# EAGLE board main (EAGLE 9.2.2)

Size 73.64 x 34.34 mm. Coordinates in mm from the lower left corner, seen from the top.
Outline: 0,0 73.64,0 73.64,34.21 0.13,34.34 0,0
Copper layers (1*16): Top 0.035mm / dielectric 1.5mm / Bottom 0.035mm
Design rules "default": minimum track width 6mil, minimum drill 0.35mm, track to track 6mil, track to pad 6mil, pad to pad 6mil, via to via 6mil, smd to smd 6mil, copper to edge 40mil, drill to drill 6mil, minimum pad ring 10mil, minimum via ring 8mil, stop-mask expansion 4mil, vias tented up to drill 0mil, thermal gap 10mil
Holes 1.27 mm at 3.68,2.16 6.22,2.16 62.48,2.41 64.9,2.54 43.43,2.41 46.1,2.41

## Footprints (pad centres in the part's own frame; a part is rotated, then mirrored left to right if it is on the bottom)
1X02 = drill 1.016 square: 1 -1.27,0 | drill 1.016 octagon: 2 1.27,0
TO92-EBC = drill 0.813 long: B 0,-1.27; C -2.54,-1.27; E 2.54,-1.27
C0402 = smd 0.7 x 0.9: 1 -0.65,0; 2 0.65,0
1206 = smd 0.7 x 0.4: P$1 0,0.5; P$2 0,-0.5
LORA-RA2-SMD = smd 3.6 x 1.2: 1 -8,7; 2 -8,5; 3 -8,3; 4 -8,1; 5 -8,-1; 6 -8,-3; 7 -8,-5; 8 -8,-7; 9 8,-7; 10 8,-5; 11 8,-3; 12 8,-1; 13 8,1; 14 8,3; 15 8,5; 16 8,7
RASPBERRYPI_BASTELSTUBE_V13_RASPI_BOARD_B+_FULL = drill 1 pad 1.778 square: 1 8.37,25.23 | drill 1 pad 1.778: 2 8.37,27.77; 3 10.91,25.23; 4 10.91,27.77; 5 13.45,25.23; 6 13.45,27.77; 7 15.99,25.23; 8 15.99,27.77; 9 18.53,25.23; 10 18.53,27.77; 11 21.07,25.23; 12 21.07,27.77; 13 23.61,25.23; 14 23.61,27.77; 15 26.15,25.23; 16 26.15,27.77; 17 28.69,25.23; 18 28.69,27.77; 19 31.23,25.23; 20 31.23,27.77; 21 33.77,25.23; 22 33.77,27.77; 23 36.31,25.23; 24 36.31,27.77; 25 38.85,25.23; 26 38.85,27.77; 27 41.39,25.23; 28 41.39,27.77; 29 43.93,25.23; 30 43.93,27.77; 31 46.47,25.23; 32 46.47,27.77; 33 49.01,25.23; 34 49.01,27.77; 35 51.55,25.23; 36 51.55,27.77; 37 54.09,25.23; 38 54.09,27.77; 39 56.63,25.23; 40 56.63,27.77 | hole 2.75: 3.5,3.5; 3.5,26.5; 61.5,3.5; 61.5,26.5
S7V8F3 = drill 0.9 pad 1.676: GND -1.27,-6.35; SHDN 3.81,-6.35; VIN 1.27,-6.35; VOUT -3.81,-6.35
TYCO_1MM_8PIN = smd 0.61 x 2.54: P$1 -3.5,4.5; P$2 -2.5,4.5; P$3 -1.5,4.5; P$4 -0.5,4.5; P$5 0.5,4.5; P$6 1.5,4.5; P$7 2.5,4.5; P$8 3.5,4.5
TYCO_1MM_12PIN = smd 0.61 x 2.5: P$1 -5.5,6; P$2 -4.5,6; P$3 -3.5,6; P$4 -2.5,6; P$5 -1.5,6; P$6 -0.5,6; P$7 0.5,6; P$8 1.5,6; P$9 2.5,6; P$10 3.5,6; P$11 4.5,6; P$12 5.5,6
BREAKBOARD = drill 0.9 pad 1.676: + 1.27,8.89; - -1.27,8.89; ALT -3.81,1.27; GND -3.81,3.81; QST 3.81,1.27; SCL 3.81,3.81; SDA 3.81,6.35; VCC -3.81,6.35

## Placement (x,y rotation side)
BAT1  [1X02]  4.95,4.45 0 top
BAT2  [1X02]  63.75,4.7 0 top
BC639  BCX59SMD  [TO92-EBC]  36.83,7.62 0 top
C1  [C0402]  1.9,-2.54 0 top
C2  [C0402]  1.9,-6.35 0 top  (outside the outline)
C3  [C0402]  1.9,-10.16 0 top  (outside the outline)
C4  [C0402]  1.9,-13.97 0 top  (outside the outline)
C5  [C0402]  1.9,-17.78 0 top  (outside the outline)
C6  [C0402]  1.9,-21.59 0 top  (outside the outline)
C7  [C0402]  1.9,-25.4 0 top  (outside the outline)
D1  DIODE1206  [1206]  6.22,9.02 180 bottom
FUSE1  [1X02]  11.3,4.45 0 top
FUSE2  [1X02]  55.5,4.57 0 top
LED_OUTPUT  [1X02]  44.7,7.49 180 top
R1  RESISTOR1206  [1206]  36.83,9.78 0 bottom
RAO1  LORA-RA-02-433MHZ  [LORA-RA2-SMD]  33.15,19.18 0 top
RAO2  RPI-ZERO  [RASPBERRYPI_BASTELSTUBE_V13_RASPI_BOARD_B+_FULL]  65.02,4.06 0 bottom
RAO3  S7V8F3  [S7V8F3]  6.22,18.16 0 top
RAO4  S7V8F3  [S7V8F3]  59.94,18.03 0 top
U$1  TYCO_8PIN_1MM_SMD  [TYCO_1MM_8PIN]  22.86,3.56 0 top
U$2  TYCO_12PIN_1MM_SMD  [TYCO_1MM_12PIN]  71.37,20.07 90 top
U$3  POLOLU_FUEL_GAUGEBREAKBOARD  [BREAKBOARD]  17.65,13.72 0 top
U$4  DIODE1206  [1206]  13.08,11.43 270 bottom
U$5  SMD_COMPONENT1206  [1206]  8.13,16.89 0 bottom
U$6  SMD_COMPONENT1206  [1206]  56.9,12.32 0 bottom
U$7  DIODE1206  [1206]  59.18,11.3 0 bottom
U$8  DIODE1206  [1206]  64.52,9.91 90 bottom
U$9  POLOLU_FUEL_GAUGEBREAKBOARD  [BREAKBOARD]  48.77,13.59 0 top

## Library data of the parts
BAT1 BAT2 FUSE1 FUSE2 LED_OUTPUT = pinhead
BC639 = transistor-npn
C1-C7 = rcl; SPICEPREFIX: C
D1 = UniversalSMD; D1: 2A
R1 = UniversalSMD; R1: 10K
RAO1 = LikeCircuit
RAO2 = RPI-Zero
RAO3 RAO4 = POLOLU-VoltageConverter
U$1 U$2 = FPCConnectors
U$3 U$9 = SparFun-FuelGauge
U$4 = UniversalSMD; D2: 2A
U$5 U$6 = UniversalSMD
U$7 = UniversalSMD; D3: 2A
U$8 = UniversalSMD; D4: 2A

## Nets
3.3V: C1.2 C2.1 C3.1 C4.1 C5.2 C6.1 C7.1 LED_OUTPUT.2 RAO1.3 RAO2.17 U$1.P$1 U$2.P$1 U$3.VCC U$4.P$2 U$7.P$2 U$9.VCC
B1: RAO2.29 U$1.P$7
B2: RAO2.31 U$1.P$6
B3: RAO2.33 U$1.P$5
BIN1: BAT1.2 D1.P$1
BIN2: BAT2.2 U$8.P$1
DIO0: RAO1.5 RAO2.7
DIO1: RAO1.6 RAO2.11
DIO2: RAO1.7 RAO2.12
DIO3: RAO1.8 RAO2.13
G1: RAO2.35 U$2.P$10
G2: RAO2.32 U$2.P$11
G3: RAO2.18 U$2.P$12
GND: BAT1.1 BAT2.1 BC639.E C1.1 C2.2 C3.2 C4.2 C5.1 C6.2 C7.2 RAO1.1 RAO1.2 RAO1.9 RAO1.16 RAO2.25 RAO3.GND RAO4.GND U$1.P$2 U$2.P$2 U$3.- U$3.GND U$5.P$1 U$6.P$1 U$9.- U$9.GND
LED: R1.P$1 RAO2.16
MISO: RAO1.13 RAO2.21 U$2.P$6
MOSI: RAO1.14 RAO2.19 U$2.P$5
N$1: BC639.B R1.P$2
N$2: FUSE2.2 U$6.P$2 U$7.P$1
N$3: FUSE1.2 U$4.P$1 U$5.P$2
N$4: BC639.C LED_OUTPUT.1
NSS: RAO1.15 RAO2.24 U$2.P$8
RESET: RAO1.4 RAO2.15
SCK: RAO1.12 RAO2.23 U$2.P$7
SCL: RAO2.5 U$1.P$3 U$2.P$3 U$3.SCL U$9.SCL
SDA: RAO2.3 U$1.P$4 U$2.P$4 U$3.SDA U$9.SDA
SS2: RAO2.26 U$2.P$9
VIN1: D1.P$2 RAO3.VIN U$3.+
VIN2: RAO4.VIN U$8.P$2 U$9.+
VOUT1: FUSE1.1 RAO3.VOUT
VOUT2: FUSE2.1 RAO4.VOUT

## Tracks (layer width: path | path; a pad name or v marks a point on that pad's centre or on a via)
3.3V  (15 unrouted)
B1  (1 unrouted)
B2  (1 unrouted)
B3  (1 unrouted)
BIN1  (1 unrouted)
BIN2  (1 unrouted)
DIO0  (1 unrouted)
DIO1  (1 unrouted)
DIO2  (1 unrouted)
DIO3  (1 unrouted)
G1  (1 unrouted)
G2  (1 unrouted)
G3  (1 unrouted)
GND  (24 unrouted)
LED  (1 unrouted)
MISO  (2 unrouted)
MOSI  (2 unrouted)
N$1  (1 unrouted)
N$2  (2 unrouted)
N$3  (2 unrouted)
N$4  (1 unrouted)
NSS  (2 unrouted)
RESET  (1 unrouted)
SCK  (2 unrouted)
SCL  (4 unrouted)
SDA  (4 unrouted)
SS2  (1 unrouted)
VIN1  (2 unrouted)
VIN2  (2 unrouted)
VOUT1  (1 unrouted)
VOUT2  (1 unrouted)